# Altium PCB MineSafe.PcbDoc
Units mil, origin at the board's own origin, x right, y up, seen from the top; angles counter-clockwise.
Board outline 6000 x 4000 mil, 2 copper layers (Top Layer, Bottom Layer); 11 components, 3 nets, 83 pads, 0 vias.
Unrouted connection lines stored in the file: 4.
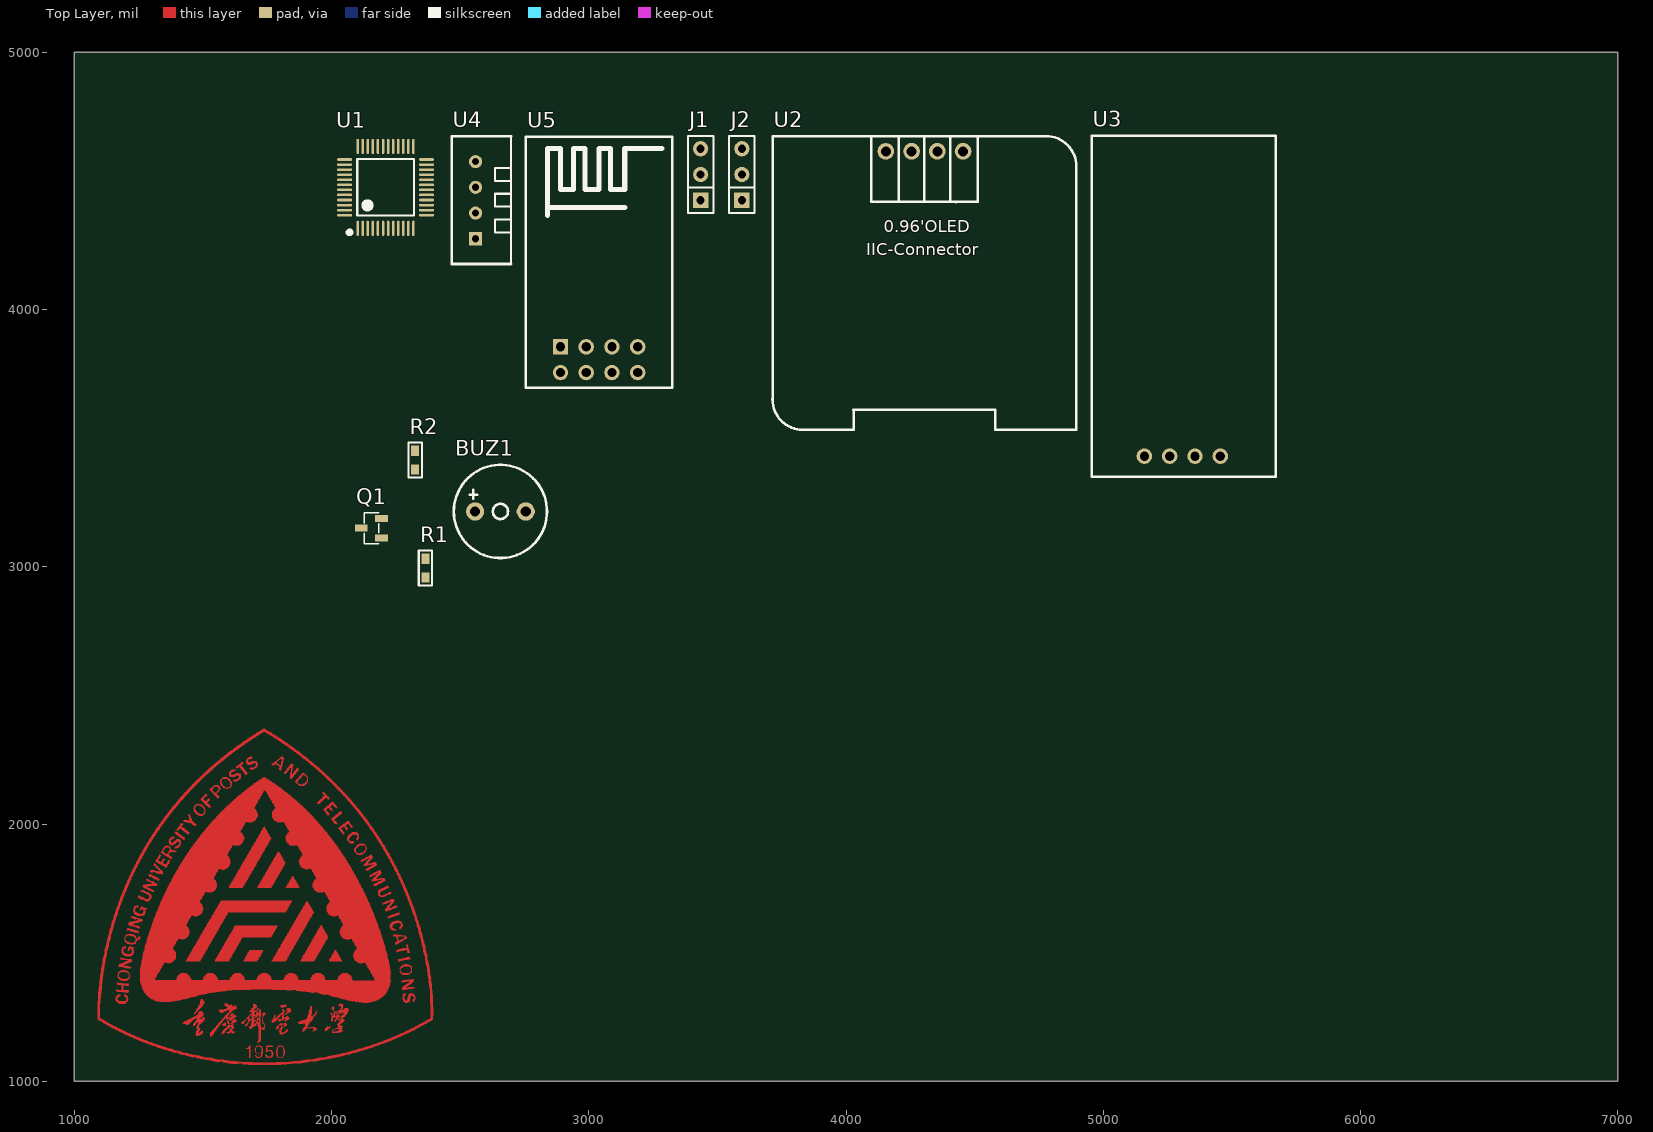
[diagram p0: Top Layer view]
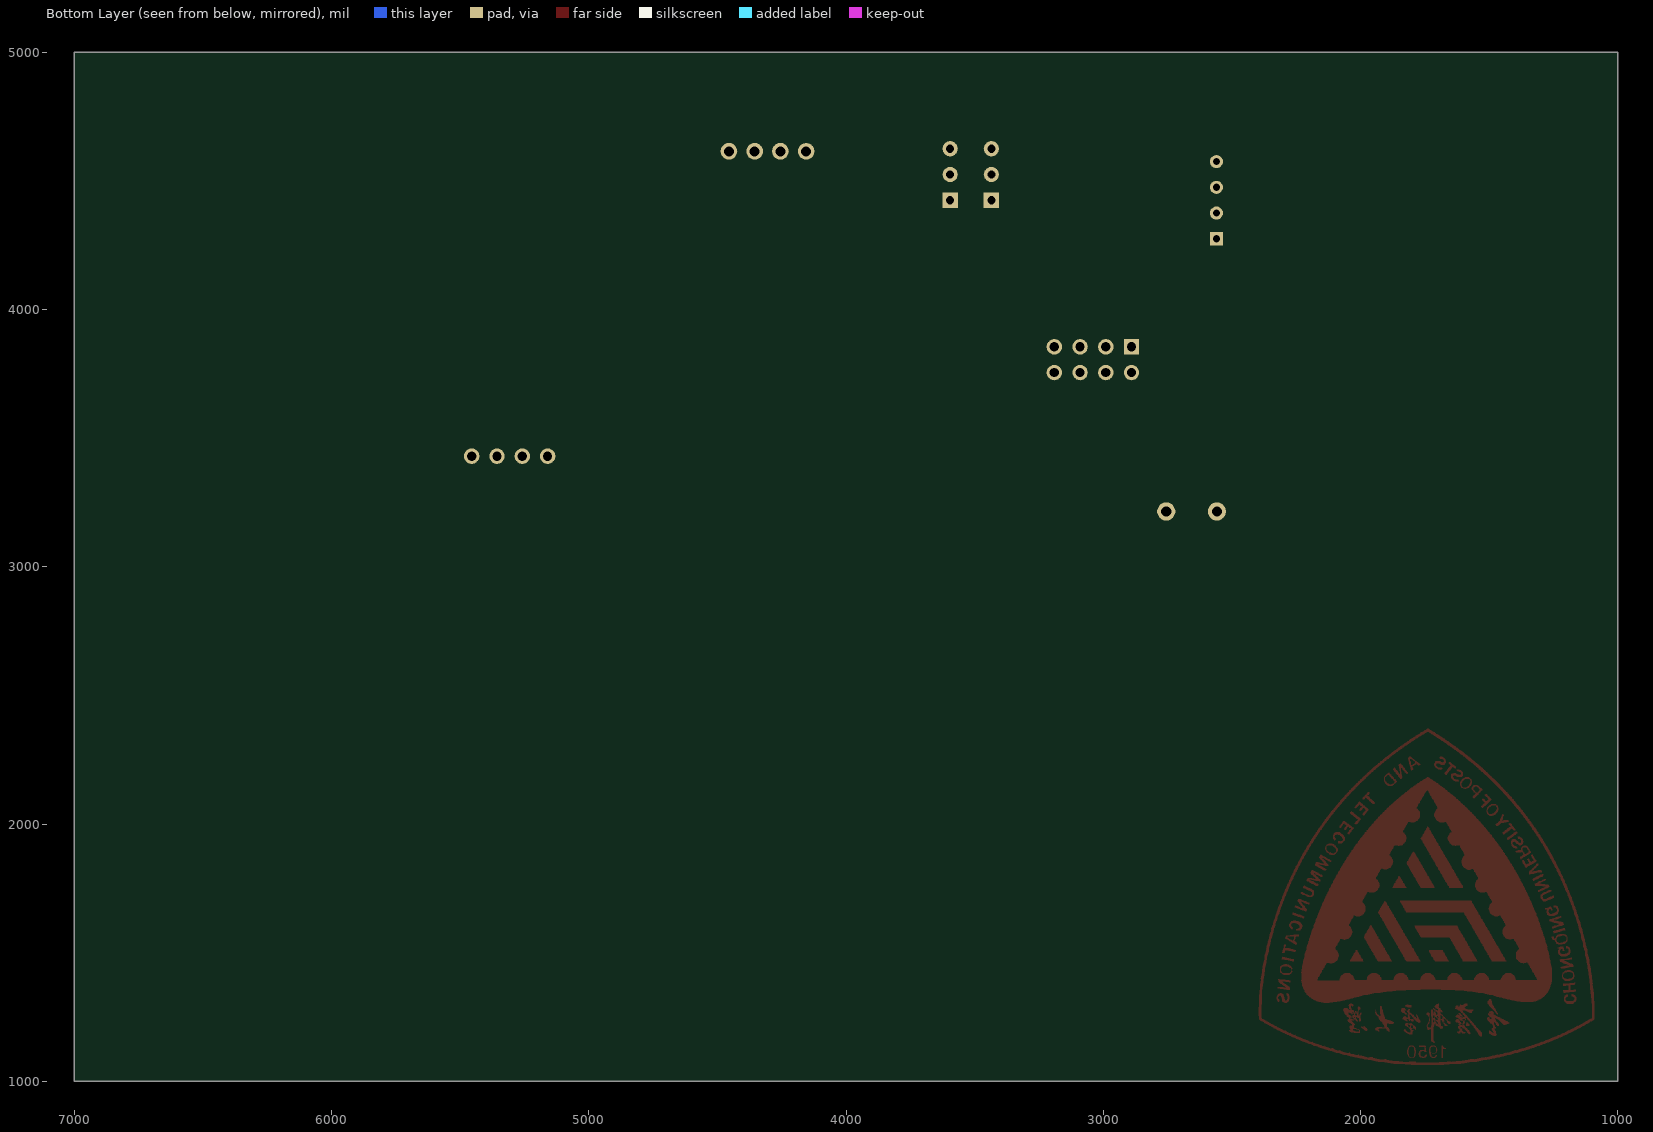
[diagram p1: Bottom Layer view, seen from below]

## Layer stack, top to bottom
Top Solder: solder mask 0.4, Solder Resist, Dk 3.5
Top Layer: signal copper 1.4
Dielectric 1: dielectric 12.6, FR-4, Dk 4.8
Bottom Layer: signal copper 1.4
Bottom Solder: solder mask 0.4, Solder Resist, Dk 3.5

## Board outline
1000,1000 7000,1000 7000,5000 1000,5000

## Design rules (kind name [scope] priority, off if disabled: settings)
Clearance [All] p1: gap=10 ignorepadtopadclearanceinfootprint=FALSE
PolygonConnect [All] p1: connectstyle=Relief reliefconductorwidth=10 reliefentries=4 polygonreliefangle="90 Angle" airgapwidth=10
RoutingVias [All] p1: holewidth=28 width=50 viastyle="Through Hole" minholewidth=28 minwidth=50 maxholewidth=28 maxwidth=50
SolderMaskExpansion [All] p1: expansion=4 istentingtop=FALSE
SupplyNets "Schematic Supply Nets" [InNet('GND')] p1: voltage=0.000
Width [All] p1: maxlimit=10 minlimit=10 preferedwidth=10
30 further rules are at their usual default settings.

## Classes and differential pairs
component class MineSafe: J1 J2 U1 U2 U3 U4 U5

## Components (designator, comment, footprint, x,y, rotation, side; value= is the part's Value field where it differs from the comment)
BUZ1 "HNB09A03 3.3V" BUZ-TH_BD9.0-P5.00-D0.6-FD 2656.58,3215 r0 top
J1 "BEEP-Module" HDR-F-2.54_1X3 3440,4525 r90 top
J2 "BEEP-Module" HDR-F-2.54_1X3 3600,4525 r90 top
Q1 "SS8050_C2150" SOT-23-3_L2.9-W1.3-P1.90-LS2.4-BR 2155,3150 r0 top
R1 "1K" "R 0603" 2365,2995 r270 top
R2 "10K" "R 0603" 2325,3415 r90 top
U1 "STM32F103C8T6" "TQFP48 7x7_L" 2210,4475 r0 top
U2 "OLED" 0.96OLED_4P 4305,4615 r0 top
U3 "" mq2 5975,5665 r90 top
U4 "DHT11" SENSOR-TH_DHT11 2560,4425 r90 top
U5 "ESP8266-01S" WIFIM-TH_ESP8266-01S 3040,3805 r0 top

## Footprints (in the part's own frame and the unit in brackets; to place one, negate y for a bottom-side part, rotate by r counter-clockwise, add the part's x,y. Pads: shape width x height; smd on the part's side, far side on the other; paste and mask are expansions set on the pad)
0.96OLED_4P [mm]
  round 1.65 hole 1 copper offset 0,0: 1(-3.81,-0.001) 2(-1.27,0.002) 3(1.27,0.002) 4(3.81,0.002)
  silkscreen extent -15,-27.5 15,1.5
BUZ-TH_BD9.0-P5.00-D0.6-FD [mm]
  round 1.8 hole 1 copper offset 0,0: 1(-2.5,0)
  round 1.8 hole 1: 2(2.5,0)
  silkscreen extent -4.6,-4.6 4.6,4.6
HDR-F-2.54_1X3 [mm]
  rect 1.5x1.5 hole 0.8: 1(-2.54,0.127)
  round 1.5 hole 0.8: 2(0,0.127) 3(2.54,0.127)
  silkscreen extent -3.81,-1.14 3.81,1.4
mq2 [mil]
  round 60 hole 36: 1(-2235,815) 2(-2235,716.57) 3(-2235,618.15) 4(-2235,519.72)
  silkscreen extent -2315,305 -990,1020
"R 0603" [mil] "1/10W贴片电阻"
  rect 40x31.5 smd: 1(-36.5,0) 2(36.5,0)
  silkscreen extent -68,-26 68,26, body extent -31,-16 31,16, height 16
SENSOR-TH_DHT11 [mil]
  rect 51x51 hole 28: 1(-150,0)
  round 51 hole 28: 2(-50,0) 3(50,0) 4(150,0)
  silkscreen extent -248,-138 248,93
SOT-23-3_L2.9-W1.3-P1.90-LS2.4-BR [mm]
  rect 1.25x0.7 smd: 1(1,-0.95) 2(1,0.95) 3(-1,0)
  silkscreen extent -0.73,-1.53 0.73,1.53
"TQFP48 7x7_L" [mm] "48脚，体宽：7x7mm, 脚距：0.5mm"
  oval 0.25x1.5 smd: 1(-2.75,-4.046) 2(-2.25,-4.046) 3(-1.75,-4.046) 4(-1.25,-4.046) 5(-0.75,-4.046) 6(-0.25,-4.046) 7(0.25,-4.046) 8(0.75,-4.046) 9(1.25,-4.046) 10(1.75,-4.046) 11(2.25,-4.046) 12(2.75,-4.046) 25(2.75,4.046) 26(2.25,4.046) 27(1.75,4.046) 28(1.25,4.046) 29(0.75,4.046) 30(0.25,4.046) 31(-0.25,4.046) 32(-0.75,4.046) 33(-1.25,4.046) 34(-1.75,4.046) 35(-2.25,4.046) 36(-2.75,4.046)
  oval 1.5x0.25 smd: 13(4.046,-2.75) 14(4.046,-2.25) 15(4.046,-1.75) 16(4.046,-1.25) 17(4.046,-0.75) 18(4.046,-0.25) 19(4.046,0.25) 20(4.046,0.75) 21(4.046,1.25) 22(4.046,1.75) 23(4.046,2.25) 24(4.046,2.75) 37(-4.046,2.75) 38(-4.046,2.25) 39(-4.046,1.75) 40(-4.046,1.25) 41(-4.046,0.75) 42(-4.046,0.25) 43(-4.046,-0.25) 44(-4.046,-0.75) 45(-4.046,-1.25) 46(-4.046,-1.75) 47(-4.046,-2.25) 48(-4.046,-2.75)
  silkscreen extent -3.68,-4.57 2.79,2.79, body extent -4.5,-4.5 4.5,4.5, height 1.05
WIFIM-TH_ESP8266-01S [mil]
  rect 60x60 hole 36 paste-99999 mask+1.97: 1(-150,50)
  round 60 hole 36 paste-99999 mask+1.97: 2(-50,50) 3(50,50) 4(150,50) 5(-150,-50) 6(-50,-50) 7(50,-50) 8(150,-50)
  silkscreen extent -285,-109 285,866

## Part data
BUZ1: Manufacturer="Jiangsu Huaneng Elec", Manufacturer Part=HNB09A03, Contributor=LCSC, spicePre=B, spiceSymbolName="HNB09A03 3.3V", Supplier=LCSC, Supplier Part=C96102
Q1: LCSC Assembly=Yes, Manufacturer=CJ, Manufacturer Part=SS8050, image=//image.lceda.cn/szlcsc/C2150.jpg, SMT Type=Basic, spicePre=Q, spiceSymbolName=SS8050_C2150, Supplier=LCSC, Supplier Part=C2150
R1: LCSC Assembly=Yes, Manufacturer=UniOhm, Manufacturer Part=0603WAF1001T5E, nameAlias="Resistance (Ohms)", SMT Type=Basic, spicePre=R, spiceSymbolName=0603WAF1001T5E, Supplier=LCSC, Supplier Part=C21190
R2: LCSC Assembly=Yes, Manufacturer=UniOhm, Manufacturer Part=0603WAF1002T5E, nameAlias="Resistance (Ohms)", SMT Type=Basic, spicePre=R, spiceSymbolName=0603WAF1002T5E, Supplier=LCSC, Supplier Part=C25804
U1: "STM32 ARM-based 32-bit MCU Performance Line with 64 kB Flash, 20 kB Internal RAM, -40 to +85癈 Temperature, 48-Pin LQFP, Tray", ComponentLink1Description="Manufacturer URL", ComponentLink1URL=http://www.st.com/, ComponentLink2Description="STM32F103 Datasheet", ComponentLink2URL=http://www.st.com/internet/com/TECHNICAL_RESOURCES/TECHNICAL_LITERATURE/DATASHEET/CD00161566.pdf, ComponentLink3Description="STM32 Family Web Page", ComponentLink3URL=www.st.com/stm32, DatasheetVersion="rev13.0, Apr-2011", PackageDescription="48-Pin Low-Profile Quad Flat Pack, 7 x 7 mm Body, 0.5 mm Pitch (LQFP48)", PackageReference=LQFP48, PackageVersion="rev13, Apr-2011", 联系售后=https://shop463601444.taobao.com
U2: library part 0.96OLED, Add into BOM=yes, Convert to PCB=yes, Device=0.96OLED, Symbol=0.96OLED
U3: library part MQ2, Add into BOM=yes, Convert to PCB=yes, Device=MQ2, Symbol=MQ2
U4: JLCPCB Part Class="Extended Part", LCSC Part Name="DHT11  电容式传感器", Manufacturer=广州奥松, Add into BOM=yes, Convert to PCB=yes, Datasheet=https://atta.szlcsc.com/upload/public/pdf/source/20170703/1499081238365.pdf, Device=DHT11, Manufacturer Part=DHT11, Supplier=LCSC, Supplier Footprint=SIP-4, Supplier Part=C117051, Symbol=DHT11
U5: JLCPCB Part Class=扩展库, Add into BOM=yes, Convert to PCB=yes, Device=ESP8266-01S, LCSC Part Name=ESP8266-01S, Manufacturer Part=ESP8266-01S, Supplier=LCSC, Supplier Footprint=TH-8P, Supplier Part=C9900150497, Symbol=ESP8266-01S
J1 J2: Add into BOM=yes, Convert to PCB=yes, Device=BEEP-Module, Symbol=BEEP-Module

## Nets (pads, with @x,y where several pads share a name; then routed paths per layer and width w, separated by ;. In a path a pad name is that pad's centre, name@x,y a point inside that pad or via, vN(x,y) a via of type N, cw(c..) or ccw(c..) an arc to the next point about the centre after c; other vN are vias at no path point)
GND: Q1.2 R2.2
NetBUZ1_2: BUZ1.2 Q1.3
NetQ1_1: Q1.1 R1.1 R2.1
pads on no net: BUZ1.1 J1.1 J1.2 J1.3 J2.1 J2.2 J2.3 R1.2 U1.1 U1.2 U1.3 U1.4 U1.5 U1.6 U1.7 U1.8 U1.9 U1.10 U1.11 U1.12 U1.13 U1.14 U1.15 U1.16 U1.17 U1.18 U1.19 U1.20 U1.21 U1.22 U1.23 U1.24 U1.25 U1.26 U1.27 U1.28 U1.29 U1.30 U1.31 U1.32 U1.33 U1.34 U1.35 U1.36 U1.37 U1.38 U1.39 U1.40 U1.41 U1.42 U1.43 U1.44 U1.45 U1.46 U1.47 U1.48 U2.1 U2.2 U2.3 U2.4 U3.1 U3.2 U3.3 U3.4 U4.1 U4.2 U4.3 U4.4 U5.1 U5.2 U5.3 U5.4 U5.5 U5.6 U5.7 U5.8

## Other copper
Top Layer:
  drawing of 84 lines, arcs and shapes, not listed

## Text inside footprints (layer, text, board x,y; h text height)
U2: Top Overlay "IIC-Connector" at 4078.4,4211.56 h47.24; Top Overlay "0.96'OLED" at 4147.6,4300.05 h47.24